# Altium PCB STM32_min.PcbDoc
Units mil, origin at the board's own origin, x right, y up, seen from the top; angles counter-clockwise.
Board outline 4531.5 x 3082.68 mil, 2 copper layers (Top Layer, Bottom Layer); 66 components, 68 nets, 278 pads, 116 vias.
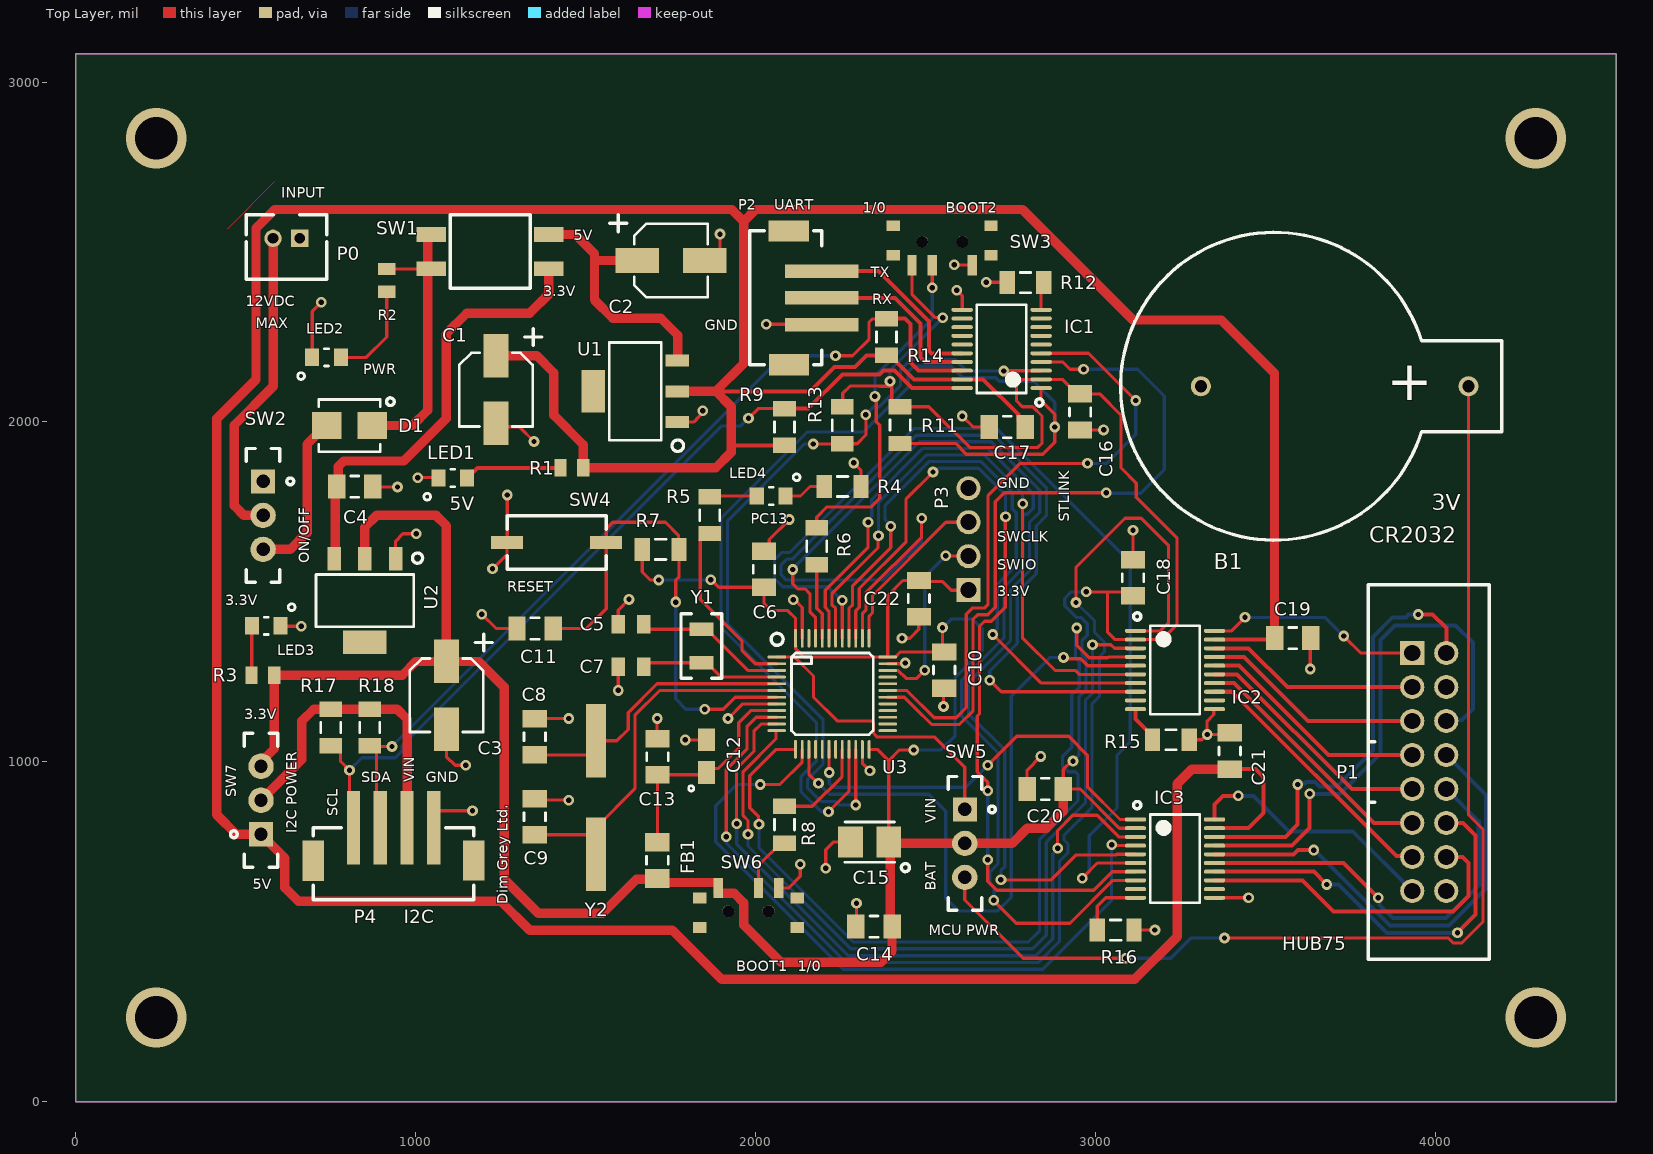
[diagram p0: Top Layer view]
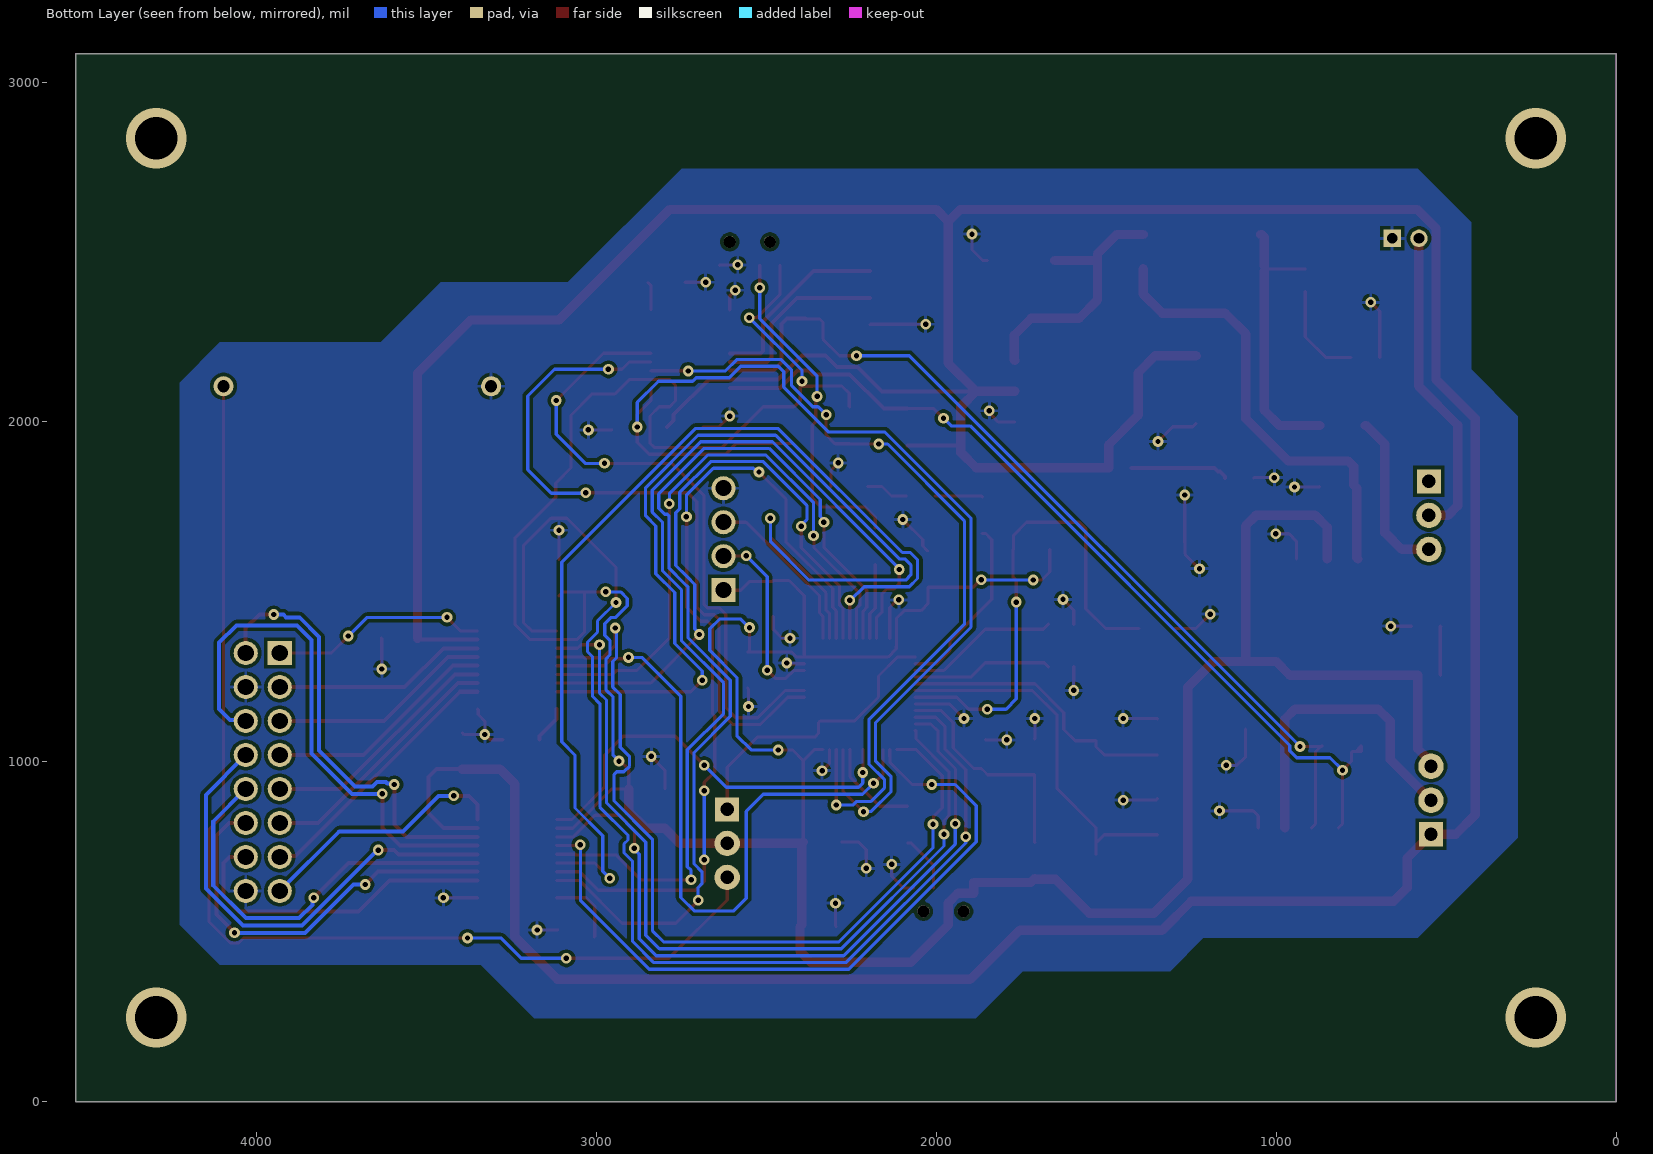
[diagram p1: Bottom Layer view, seen from below]

## Layer stack, top to bottom
Top Solder: solder mask 0.4, Solder Resist, Dk 3.5
Top Layer: signal copper 1.4
Dielectric 1: dielectric 12.6, FR-4, Dk 4.8
Bottom Layer: signal copper 1.4
Bottom Solder: solder mask 0.4, Solder Resist, Dk 3.5

## Board outline
0,0 4531.5,0 4531.5,3082.68 0,3082.68

## Design rules (kind name [scope] priority, off if disabled: settings)
Clearance [All] p1: gap=10 ignorepadtopadclearanceinfootprint=FALSE except(0: Arc-Hole Track-Hole SMDPad-Hole THPad-Hole Via-Hole Fill-Hole Poly-Hole Region-Hole Text-Hole)
PolygonConnect [All] p1: connectstyle=Relief reliefconductorwidth=10 reliefentries=4 polygonreliefangle="90 Angle" airgapwidth=10
RoutingVias [All] p1: holewidth=15.75 width=31.5 viastyle="Through Hole" minholewidth=15.75 minwidth=31.5 maxholewidth=15.75 maxwidth=31.5
SolderMaskExpansion [All] p1: expansion=4 istentingtop=FALSE
Width [All] p1: maxlimit=27.56 minlimit=9.45 preferedwidth=11.81
30 further rules are at their usual default settings.

## Classes and differential pairs
component class STM32_min: B1 C5 C6 C7 C8 C9 C10 C11 C12 C13 C14 C15 FB1 LED4 R4 R5 R6 R7 R8 SW3 SW4 SW5 SW6 U3 Y1 Y2
component class STM32_Lvl-Shft_MCU: C16 C17 IC1 R9 R11 R12 R13 R14
component class STM32_Lvl-Shft_HUB75: C18 C19 C20 C21 IC2 IC3 R15 R16
component class STM32_IO: C22 P1 P2 P3 P4 R17 R18 SW7
component class STM32_Input: C1 C2 C3 C4 D1 LED1 LED2 LED3 P0 R1 R2 R3 SW1 SW2 U1 U2

## Components (designator, comment, footprint, x,y, rotation, side; value= is the part's Value field where it differs from the comment)
B1 "3V CR1220" THT_BH-25T-GLD 4097.2,2104.84 r180 top
C1 "10uF" SMT_CAP_EL_CHANG_VT1E100MC054000CE0 1235.71,2094.88 r270 top
C2 "10uF" SMT_CAP_EL_CHANG_VT1E100MC054000CE0 1750.71,2474.88 r0 top
C3 "10uF" SMT_CAP_EL_CHANG_VT1E100MC054000CE0 1090.16,1195.81 r270 top
C4 "100nF" SMT_CAP_1206(3216)_SAMSUNG 820.16,1809.33 r180 top
C5 "10pF" SMT_CAP_CER_MODEL_0805(2012)_SAMSUNG 1633.03,1404.84 r0 top
C6 "100nF" SMT_CAP_MODEL_1206(3216)_SAMSUNG 2024.8,1566.69 r90 top
C7 "10pF" SMT_CAP_CER_MODEL_0805(2012)_SAMSUNG 1633.03,1279.84 r0 top
C8 "30pF" SMT_CAP_MODEL_1206(3216)_SAMSUNG 1350.08,1073.39 r270 top
C9 "30pF" SMT_CAP_MODEL_1206(3216)_SAMSUNG 1350.08,838.39 r270 top
C10 "100nF" SMT_CAP_MODEL_1206(3216)_SAMSUNG 2554.8,1269.84 r270 top
C11 "100nF" SMT_CAP_MODEL_1206(3216)_SAMSUNG 1350.94,1392.09 r0 top
C12 "1uF" SMT_CAP_TANT_MODEL_1206(3216)_KYOCERA 1855.43,1016.61 r90 top
C13 "100nF" SMT_CAP_MODEL_1206(3216)_SAMSUNG 1710.83,1014.84 r90 top
C14 "100nF" SMT_CAP_MODEL_1206(3216)_SAMSUNG 2348.12,514.84 r180 top
C15 "10uF" SMT_CAP_TANT_MODEL_1210(3528)_KYOCERA 2335.43,763.7 r180 top
C16 "100nF" SMT_CAP_MODEL_1206(3216)_SAMSUNG 2954.8,2029.25 r270 top
C17 "100nF" SMT_CAP_MODEL_1206(3216)_SAMSUNG 2739.8,1984.84 r180 top
C18 "100nF" SMT_CAP_MODEL_1206(3216)_SAMSUNG 3109.8,1541.69 r90 top
C19 "100nF" SMT_CAP_MODEL_1206(3216)_SAMSUNG 3579.8,1363.8 r0 top
C20 "100nF" SMT_CAP_MODEL_1206(3216)_SAMSUNG 2851.65,919.84 r180 top
C21 "100nF" SMT_CAP_MODEL_1206(3216)_SAMSUNG 3394.8,1031.69 r90 top
C22 "100nF" SMT_CAP_MODEL_1206(3216)_SAMSUNG 2480.08,1480.24 r270 top
D1 "1A" SMT_DIODE_SCHTKY_SMB_ONSEMI 805.16,1989.33 r0 top
FB1 "120Ω/3.5A" SMT_FERR_BEAD_MODEL_1206(3216)_MURATA 1710.43,709.84 r90 top
IC1 "TXS0108E" SMT_TXS0108E_IC 2723.66,2214.69 r180 top
IC2 "TXS0108E" SMT_TXS0108E_IC 3233.66,1270 r0 top
IC3 "TXS0108E" SMT_TXS0108E_IC 3233.66,715 r0 top
LED1 "RED" DIOM2012X18N 1108.58,1834.88 r180 top
LED2 "RED" DIOM2012X18N 737.48,2189.84 r180 top
LED3 "RED" DIOM2012X18N 559.8,1399.84 r0 top
LED4 "BUILT-IN PC13" DIOM2012X18N 2045.43,1781.97 r0 top
P0 "12VDC" THT_CON_WAFER_2P_STRAIGHT_A2001WV2-2P 580.16,2540.08 r0 top
P1 "HUB75" THT_CON_2316S-16G 3981.02,969.8 r0 top
P2 "UART" SMT_CON_STRAIGHT_2417SJ-03-SM2 2088.66,2364.69 r90 top
P3 "STLINK" THT_STLINK_HEADER_4P_MALE 2626.27,1654.84 r90 top
P4 "I2C" SMT_CON_STRAIGHT_2417SJ-04-SM2 934.8,699.84 r180 top
R1 "1K" SMT_RES_0805(2012) 1459.17,1864.88 r0 top
R2 "1K" SMT_RES_0805(2012) 914.8,2416.38 r90 top
R3 "500" SMT_RES_0805(2012) 550.12,1254.88 r0 top
R4 "10K" SMT_RES_MODEL_1206(3216)_ROHM 2255.67,1809.84 r0 top
R5 "0Ω" SMT_RES_MODEL_1206(3216)_ROHM 1864.8,1725.71 r90 top
R6 "10K" SMT_RES_MODEL_1206(3216)_ROHM 2179.8,1633.98 r90 top
R7 "10K" SMT_RES_MODEL_1206(3216)_ROHM 1720.43,1624.84 r180 top
R8 "10K" SMT_RES_MODEL_1206(3216)_ROHM 2084.8,814.84 r90 top
R9 "10K" SMT_RES_MODEL_1206(3216)_ROHM 2084.8,1984.84 r90 top
R11 "4.7K" SMT_RES_MODEL_1206(3216)_ROHM 2424.8,1990.71 r270 top
R12 "4.7K" SMT_RES_MODEL_1206(3216)_ROHM 2793.94,2409.84 r0 top
R13 "4.7K" SMT_RES_MODEL_1206(3216)_ROHM 2254.8,1989.84 r90 top
R14 "10K" SMT_RES_MODEL_1206(3216)_ROHM 2384.8,2249.84 r90 top
R15 "4.7K" SMT_RES_MODEL_1206(3216)_ROHM 3221.81,1065 r0 top
R16 "4.7K" SMT_RES_MODEL_1206(3216)_ROHM 3058.94,504.84 r0 top
R17 "7K" SMT_RES_MODEL_1206(3216)_ROHM 749.69,1100.87 r270 top
R18 "7K" SMT_RES_MODEL_1206(3216)_ROHM 864.69,1100.87 r270 top
SW1 "DIS02G01-R" SMT_SWITCH_DIP_DIS02G01-R 1045.16,2551.21 r270 top
SW2 "INPUT OFF/ON" THT_SSW_ESP1010 550.71,1824.88 r270 top
SW3 "BOOT2" SMT_SWW_SS-B90AP_DAWNING 2548.66,2529.69 r180 top
SW4 "TS-A07GS" SMT_TSW-A07GS 1268.74,1645.24 r0 top
SW5 "3.3V/BAT" THT_SSW_ESP1010 2615.43,859.84 r270 top
SW6 "BOOT1" SMT_SWW_SS-B90AP_DAWNING 1978.86,559.84 r0 top
SW7 "3.3V/5V" THT_SSW_ESP1010 544.69,786.73 r90 top
U1 "LM1117" SOT230P700X180-4N 1645.71,2089.88 r180 top
U2 "LD1117AS3" SMT_VR_LD1117AS3 850.16,1474.33 r270 top
U3 "STM32F103" SMT_IC_STM32F103 2225.43,1199.84 r0 top
Y1 "32.768KHz" SMT_XTAL_FC-135_EPSON 1840.43,1340.63 r90 top
Y2 "8MHz" SMT_XTAL_ATS08ASM-1E 1530.43,894.84 r90 top

## Footprints (in the part's own frame and the unit in brackets; to place one, negate y for a bottom-side part, rotate by r counter-clockwise, add the part's x,y. Pads: shape width x height; smd on the part's side, far side on the other; paste and mask are expansions set on the pad)
DIOM2012X18N [mm] "Molded Diode, 2-Leads, Body 2,00x1,25mm, IPC Medium Density"
  rect 1.05x1.3 smd: 1(-1.075,0) 2(1.075,0)
  silkscreen extent -0.15,-0.65 2.16,1.65, body extent -1.1,-0.63 1.1,0.63, height 0.8
SMT_CAP_1206(3216)_SAMSUNG [mm] "Ceramic Capacitor 1206(3216) Samsung CL31B104KBCNNNC 50VDC"
  rect 1.3x1.8 smd: 1(-1.35,0) 2(1.35,0)
  silkscreen extent -0.3,-0.8 0.3,0.8, body extent -1.6,-0.9 1.6,0.9, height 1.8
SMT_CAP_CER_MODEL_0805(2012)_SAMSUNG [mm] "SMT SAMSUNG Ceramic Capacitor MODEL *V *pF 0805(2012) CL21C100DBANNNC(etc.)"
  rect 1x1.4 smd: 1(-0.95,0) 2(0.95,0)
  body extent -1.05,-0.67 1.05,0.67, height 1.35
SMT_CAP_EL_CHANG_VT1E100MC054000CE0 [mm] "SMT Capacitor Electrolytic 35V 10uF Pitch 1.3mm VT1E100MC054000CE0"
  rect 3.25x1.85 smd: 1(-2.525,0) 2(2.525,0)
  silkscreen extent -4.57,-2.75 2.75,3.43, body extent -2.75,-2.75 2.75,2.75, height 5.7
SMT_CAP_MODEL_1206(3216)_SAMSUNG [mm] "SMT Samsung Ceramic Capacitor MODEL *V *nF 1206(3216)  CL31B104KBCNNNC(etc.)"
  rect 1.3x1.8 smd: 1(-1.35,0) 2(1.35,0)
  silkscreen extent -0.3,-0.8 0.3,0.8, body extent -1.6,-0.9 1.6,0.9, height 1.8
SMT_CAP_TANT_MODEL_1206(3216)_KYOCERA [mm] "SMT KYOCERA Tantalum Capacitor MODEL *V *uF 1206(3216) EAN_3216-18 TAJA105M016RNJ(etc.)"
  rect 1.7x1.3 smd: 1(-1.225,0) 2(1.225,0)
  silkscreen extent -2.61,0.95 -2.22,1.34, body extent -1.7,-0.9 1.7,0.9, height 1.8
SMT_CAP_TANT_MODEL_1210(3528)_KYOCERA [mm] "SMT KYOCERA Tantalum Capacitor MODEL *V *uF 1210(3528)  TAJB106K016RNJ(etc.)"
  rect 1.85x2.3 smd: 1(-1.425,0) 2(1.425,0)
  silkscreen extent -2.97,-1.5 1.85,2.21, body extent -1.85,-1.5 1.85,1.5, height 2.1
SMT_CON_STRAIGHT_2417SJ-03-SM2 [mm] "Connector 3P NELTRON 2417SJ-03-SM2-CR 100V/2A 2.0mm Pitch SMT"
  rect 1x5.5 smd: 1(-2,-2.7) 2(0,-2.7) 3(2,-2.7)
  rect 1.6x3 smd: ""(-5,-0.25) ""(5,-0.225)
  silkscreen extent -5.01,-2.7 5.01,2.7, body extent -5,-2.7 5,2.7, height 6.5
SMT_CON_STRAIGHT_2417SJ-04-SM2 [mm] "Connector 4P NELTRON 2417SJ-04-SM2-CR 100V/2A 2.0mm Pitch SMT"
  rect 1x5.5 smd: 1(-3,-2.7) 2(-1,-2.7) 3(1,-2.7) 4(3,-2.7)
  rect 1.6x3 smd: ""(-6,-0.25) ""(6,-0.225)
  silkscreen extent -6,-2.7 6,2.7, body extent -6,-2.7 6,2.7, height 6.5
SMT_DIODE_SCHTKY_SMB_ONSEMI [mm] "SMT Diode Schottky ONSEMI MODEL IF=1A VR=20V FV=0.6V MBRS120T3G"
  rect 2.2x2.05 smd: 1(-1.7,0) 2(1.7,0)
  silkscreen extent -2.3,-1.95 3.34,2.07, body extent -2.28,-1.91 2.29,1.91, height 1.8
SMT_FERR_BEAD_MODEL_1206(3216)_MURATA [mm] "SMT MURATA Ferrite Bead MODEL 1206(3216) BLM31PG121SN1L *?/*mA"
  rect 1.39x1.82 smd: 1(-1.355,0) 2(1.355,0)
  silkscreen extent -0.3,-0.81 0.3,0.81, body extent -1.7,-0.9 1.7,0.9, height 1.3
SMT_IC_STM32F103 [mm] "MCU STM32F103x8 LQFP48 pinout"
  oval 1.4x0.21 smd: 1(-4.15,2.75) 2(-4.15,2.25) 3(-4.15,1.75) 4(-4.15,1.25) 5(-4.15,0.75) 6(-4.15,0.25) 7(-4.15,-0.25) 8(-4.15,-0.75) 9(-4.15,-1.25) 10(-4.15,-1.75) 11(-4.15,-2.25) 12(-4.15,-2.75) 25(4.15,-2.75) 26(4.15,-2.25) 27(4.15,-1.75) 28(4.15,-1.25) 29(4.15,-0.75) 30(4.15,-0.25) 31(4.15,0.25) 32(4.15,0.75) 33(4.15,1.25) 34(4.15,1.75) 35(4.15,2.25) 36(4.15,2.75)
  oval 0.21x1.4 smd: 13(-2.75,-4.15) 14(-2.25,-4.15) 15(-1.75,-4.15) 16(-1.25,-4.15) 17(-0.75,-4.15) 18(-0.25,-4.15) 19(0.25,-4.15) 20(0.75,-4.15) 21(1.25,-4.15) 22(1.75,-4.15) 23(2.25,-4.15) 24(2.75,-4.15) 37(2.75,4.15) 38(2.25,4.15) 39(1.75,4.15) 40(1.25,4.15) 41(0.75,4.15) 42(0.25,4.15) 43(-0.25,4.15) 44(-0.75,4.15) 45(-1.25,4.15) 46(-1.75,4.15) 47(-2.25,4.15) 48(-2.75,4.15)
  silkscreen extent -4.57,-3.05 3.05,4.52, body extent -3.45,-3.45 3.45,3.45, height 1.6
SMT_RES_0805(2012) [mm] "0805(2012) Resistor 1/4-1/8W 150V 2A"
  rect 0.9x1.3 smd: 1(-0.85,0) 2(0.85,0)
  body extent -1.1,-0.65 1.1,0.65, height 0.55
SMT_RES_MODEL_1206(3216)_ROHM [mm] "SMT ROHM Resistor MODEL 1206(3216) 1/4W MCR18ERTJ000"
  rect 1.15x1.7 smd: 1(-1.375,0) 2(1.375,0)
  silkscreen extent -0.4,-0.75 0.4,0.75, body extent -1.6,-0.85 1.6,0.85, height 0.65
SMT_SWITCH_DIP_DIS02G01-R [mm] "DIP SMD Switch 2-Line 4-Pole 2.54Pitch Rating 25mA/24Vdc Height 0.70mm"
  rect 1.1x2.2 smd: 1(0,0) 2(2.55,0) 3(2.55,8.8) 4(0,8.8)
  silkscreen extent -1.49,1.42 4.01,7.42, body extent -1.5,1.4 4,7.4, height 4
SMT_SWW_SS-B90AP_DAWNING [mm] "Slide Switch SMD 12V 50mA 2-POS SS-B90AP-W-SP2-S085"
  rect 0.7x1.5 smd: 1(-2.25,1.75) 2(0.75,1.75) 3(2.25,1.75)
  rect 1x0.8 smd: ""(-3.65,-1.2) ""(-3.65,1) ""(3.65,-1.2) ""(3.65,1)
  round 0.9 hole 0.9: ""(-1.5,0) ""(1.5,0)
  body extent -3.3,-2.88 3.3,1.38, height 1.4
SMT_TSW-A07GS [mm] "Tactile Switch TS-A07GS 50mA 12V"
  rect 2.4x1 smd: 1(0,0) 2(7.4,0)
  silkscreen extent 0,-2 7.4,2, body extent 0.7,-1.6 6.7,1.6, height 2.5
SMT_TXS0108E_IC [mm] "TXS0108E 8-BIT Bi-Directional Level Shifter 1.2-3.6V(A) 1.65-5.5V(B)"
  oval 1.6x0.3 smd: 1(-2.95,2.925) 2(-2.95,2.275) 3(-2.95,1.625) 4(-2.95,0.975) 5(-2.95,0.325) 6(-2.95,-0.325) 7(-2.95,-0.975) 8(-2.95,-1.625) 9(-2.95,-2.275) 10(-2.95,-2.925) 11(2.95,-2.925) 12(2.95,-2.275) 13(2.95,-1.625) 14(2.95,-0.975) 15(2.95,-0.325) 16(2.95,0.325) 17(2.95,0.975) 18(2.95,1.625) 19(2.95,2.275) 20(2.95,2.925)
  silkscreen extent -3.1,-3.3 1.85,4.27, body extent -2.25,-3.3 2.25,3.3, height 1.2
SMT_VR_LD1117AS3 [mm] "Voltage Regulator ST LD1117AS33TR 1A 3.3V 10Vmax"
  rect 1.75x1 smd: 1(-3.125,2.3) 2(-3.125,0) 3(-3.125,-2.3)
  rect 1.75x3.25 smd: 4(3.125,0)
  silkscreen extent -3.56,-3.65 1.95,4.32, body extent -1.85,-3.65 1.85,3.65, height 1.8
SMT_XTAL_ATS08ASM-1E [mm] "SMD Quartz Crystal ATS08ASM-1E 20pF 8MHz"
  rect 5.5x1.5 smd: 1(-4.24,0) 2(4.24,0)
  body extent -5.5,-2.4 5.55,2.4, height 3.6
SMT_XTAL_FC-135_EPSON [mm] "SMD Quartz Crystal EPSON FC-135 12.5pF 32.768KHz ±20.0ppm"
  rect 1x1.8 smd: 1(-1.25,0) 2(1.25,0)
  silkscreen extent -2.41,-1.52 2.41,1.52, body extent -1.6,-0.76 1.6,0.76, height 1
SOT230P700X180-4N [mm] "SOT223, 4-Leads, Body 7,00x7,00mm (avg), Pitch 2,30mm, IPC Medium Density"
  rect 1.75x0.9 smd: 1(-3.125,2.3) 2(-3.125,0) 3(-3.125,-2.3)
  rect 1.75x3.2 smd: 4(3.125,0)
  silkscreen extent -3.61,-3.65 1.95,4.49, body extent -1.85,-3.65 1.85,3.65, height 1.8
THT_BH-25T-GLD [mm] "Battery Holder for CR-2032 Type Battery BH-25T-GLD"
  round 1.5 hole 0.9: 1(0,0) 2(20,0)
  silkscreen extent -2.5,-11.5 26,11.5, body extent -2.5,-11.5 26,11.5, height 7.7
THT_CON_2316S-16G [mm] "Connector 2316S-16G 16 Pin 2.54 Pitch"
  rect 1.8x1.8 hole 1.2: 1(-1.25,8.895)
  round 1.8 hole 1.2: 2(1.29,8.895) 3(-1.25,6.355) 4(1.29,6.355) 5(-1.25,3.815) 6(1.29,3.815) 7(-1.25,1.275) 8(1.29,1.275) 9(-1.25,-1.265) 10(1.29,-1.265) 11(-1.25,-3.805) 12(1.29,-3.805) 13(-1.25,-6.345) 14(1.29,-6.345) 15(-1.25,-8.885) 16(1.29,-8.885)
  silkscreen extent -4.55,-13.99 4.5,13.99, body extent -4.59,-14.03 4.55,14, height 8.85
THT_CON_WAFER_2P_STRAIGHT_A2001WV2-2P [mm] "Connector Wafer 2-Pins Pitch-2.0mm Straight Pins A2001WV2-2P"
  rect 1.3x1.3 hole 0.8: 1(2,0)
  round 1.3 hole 0.8: 2(0,0)
  silkscreen extent -2,-3.05 4,1.75, body extent -2.1,-3.2 4.1,1.9, height 6
THT_SSW_ESP1010 [mm] "Slide Switch ESP1010 12V 0.5A"
  rect 1.8x1.8 hole 1: 1(0,0)
  round 1.9 hole 1: 2(5.08,0) 3(2.54,0)
  silkscreen extent -2.46,-1.25 7.54,2.29, body extent -2.44,-1.25 7.56,1.25, height 9.5
THT_STLINK_HEADER_4P_MALE [mm] "Dupont Header Male STLINK 4P 2.54 Pitch"
  rect 1.8x1.8 hole 1.2: 1(-3.81,0)
  round 1.8 hole 1.2: 2(-1.27,0) 3(1.27,0) 4(3.81,0)
  body extent -5.08,-1.27 5.08,1.27, height 8.54

## Part data
B1: library part THT_BH-25T-GLD, "Battery Holder for CR-2032 Type Battery BH-25T-GLD"
C1 C2 C3: library part SMT_CAP_EL_CHANG_VT1E100MC054000CE0, "SMT Capacitor Electrolytic 35V 10uF Pitch 1.3mm VT1E100MC054000CE0"
C4: library part SMT_CAP_1206(3216)_SAMSUNG, "Ceramic Capacitor 1206(3216) Samsung CL31B104KBCNNNC 50VDC"
C5 C7: library part SMT_CAP_CER_MODEL_0805(2012)_SAMSUNG, "SMT SAMSUNG Ceramic Capacitor MODEL *V *pF 0805(2012) CL21C100DBANNNC(etc.)"
C6 C8 C9 C10 C11 C13 C14 C16 C17 C18 C19 C20 C21 C22: library part SMT_CAP_MODEL_1206(3216)_SAMSUNG, "SMT Samsung Ceramic Capacitor MODEL *V *nF 1206(3216)  CL31B104KBCNNNC(etc.)"
C12: library part SMT_CAP_TANT_MODEL_1206(3216)_KYOCERA, "SMT KYOCERA Tantalum Capacitor MODEL *V *uF 1206(3216) EAN_3216-18 TAJA105M016RNJ(etc.)"
C15: library part SMT_CAP_TANT_MODEL_1210(3528)_KYOCERA, "SMT KYOCERA Tantalum Capacitor MODEL *V *uF 1210(3528)  TAJB106K016RNJ(etc.)"
D1: library part SMT_DIODE_SCHTKY_SMB_ONSEMI, "SMT Diode Schottky ONSEMI MODEL IF=1A VR=20V FV=0.6V MBRS120T3G"
FB1: library part SMT_FERR_BEAD_MODEL_1206(3216)_MURATA, "SMT MURATA Ferrite Bead MODEL 1206(3216) BLM31PG121SN1L *Ω/*mA"
IC1 IC2 IC3: library part SMT_TXS0108E_IC, "TXS0108E 8-BIT Bi-Directional Level Shifter 1.2-3.6V(A) 1.65-5.5V(B)"
LED1 LED2 LED3 LED4: library part SMT_LED_0805(2012), "Led Diode 0805(2012) Cathode Mark, 20mA"
P0: library part THT_CON_WAFER_2P_STRAIGHT_A2001WV2-2P, "Connector Wafer 2-Pins Pitch-2.0mm Straight Pins A2001WV2-2P"
P1: library part THT_CON_2316S-16G, "Connector 2316S-16G 16 Pin 2.54 Pitch"
P2: library part SMT_CON_STRAIGHT_2417SJ-03-SM2, "Connector 3P NELTRON 2417SJ-03-SM2-CR 100V/2A 2.0mm Pitch SMT"
P3: library part THT_STLINK_HEADER_4P_MALE, "Dupont Header Male STLINK 4P 2.54 Pitch"
P4: library part SMT_CON_STRAIGHT_2417SJ-04-SM2, "Connector 4P NELTRON 2417SJ-04-SM2-CR 100V/2A 2.0mm Pitch SMT"
R1 R2 R3: library part SMT_RES_0805(2012), "0805(2012) Resistor 1/4-1/8W 150V 2A"
R4 R5 R6 R7 R8 R9 R11 R12 R13 R14 R15 R16 R17 R18: library part SMT_RES_MODEL_1206(3216)_ROHM, "SMT ROHM Resistor MODEL 1206(3216) 1/4W MCR18ERTJ000"
SW1: library part SMT_SWITCH_DIP_DIS02G01-R, "DIP SMD Switch 2-Line 4-Pole 2.54Pitch Rating 25mA/24Vdc Height 0.70mm"
SW2 SW5 SW7: library part THT_SSW_ESP1010, "Slide Switch ESP1010 12V 0.5A"
SW3 SW6: library part SMT_SWW_SS-B90AP_DAWNING, "Slide Switch SMD 12V 50mA 2-POS SS-B90AP-W-SP2-S085"
SW4: library part SMT_TSW-A07GS, "Tactile Switch TS-A07GS 50mA 12V"
U1: library part LM1117_SOT-223, "LM1117 SOT-223 5V HTC Voltage Regulator"
U2: library part SMT_VR_LD1117AS3, "Voltage Regulator ST LD1117AS33TR 1A 3.3V 10Vmax"
U3: library part SMT_IC_STM32F103, "MCU STM32F103x8 LQFP48 pinout"
Y1: library part SMT_XTAL_FC-135_EPSON, "SMD Quartz Crystal EPSON FC-135 12.5pF 32.768KHz ±20.0ppm"
Y2: library part SMT_XTAL_ATS08ASM-1E, "SMD Quartz Crystal ATS08ASM-1E 20pF 8MHz"

## Via types
v1: diameter 31.5, hole 15.75, Top Layer to Bottom Layer, 112 vias
v2: diameter 177.17, hole 125.98, Top Layer to Bottom Layer, 4 vias

## Nets (pads, with @x,y where several pads share a name; then routed paths per layer and width w, separated by ;. In a path a pad name is that pad's centre, name@x,y a point inside that pad or via, vN(x,y) a via of type N, cw(c..) or ccw(c..) an arc to the next point about the centre after c; other vN are vias at no path point)
+3.3V: C3.1 C6.1 C10.1 C14.1 C15.1 C16.1 C18.1 C20.1 C22.1 FB1.1 IC1.2 IC2.2 IC3.2 P3.1 R3.2 R7.2 R11.1 R13.2 SW3.3 SW5.3 SW6.1 SW7.2 U2.2 U3.24 U3.36 U3.48 | length 11294.5
  Top Layer w9.45: R7.2 1666.3,1558.35 1689.8,1534.84 v1(1714.8,1534.84) ; v1(1867.4,1535.14) 1870.37,1535.14 1891.97,1513.54 C6.1 2024.8,1464.84 2044.8,1444.84 2094.8,1444.84 2117.17,1422.48 2117.17,1340.98 2117.76,1340.39 2117.76,1332.23 2142.05,1307.93 U3.36@2366.57,1307.93 ; R13.2 2256.43,2045.61 2256.43,2084.43 2277.45,2105.44 2363.45,2105.44 2364.05,2104.84 v1@2400.64,2104.84 ; U3.24 2358.19,1036.46 2391.54,1003.11 ; U3.36@2366.57,1308.11 U3.36 ; C15.1 2391.54,1003.11 ; v1(2395.25,2119.39) 2399.47,2115.18 2399.47,2106.02 v1@2400.64,2104.84 ; SW3.3 2460.08,2374.6 2507.19,2327.49 2527.38,2307.3 2549.75,2307.3 v1(2550.28,2306.78) ; v1(2464.8,1034.84) 2423.27,1034.84 2391.54,1003.11 ; v1(2549.8,1394.84) 2549.8,1327.99 C10.1 2475.17,1322.99 2475.01,1323.15 2426.09,1323.15 2411.05,1308.11 U3.36 ; P3.1 2575.47,1504.84 2550.08,1530.24 2483.23,1530.24 C22.1 2433.23,1533.39 2388.82,1488.98 U3.36 ; v1(2933.56,1002.05) 2929.24,1002.05 2904.8,977.62 C20.1 2954.8,919.84 3070.08,804.57 IC3.2 ; v1(2973.03,1499.84) 3034.8,1499.84 ; C18.1 3098.5,1499.84 3034.8,1499.84 ; v1@2400.64,2104.84 2400.64,2062.76 2418.56,2044.84 2509.8,2044.84 2629.8,1924.84 2829.8,1924.84 2842.41,1937.45 2842.41,2017.23 2814.8,2044.84 2784.62,2044.84 2767.3,2062.16 2767.3,2107.34 2785.08,2125.12 IC1.2 2902.24,2125.12 2944.96,2082.4 C16.1 3012.24,2082.4 3074.8,2019.84 3074.8,1864.84 3119.8,1819.84 3119.8,1777.83 3239.8,1657.83 3239.8,1404.84 3194.53,1359.57 IC2.2 3057.58,1359.57 3034.8,1382.35 3034.8,1499.84
  Top Layer w27.56: SW7.2 544.69,999.52 583.58,1038.41 R3.2 959.84,1254.88 1000.18,1295.22 C3.1 ; U2.2 850.16,1690.2 884.8,1724.84 1059.8,1724.84 1090.16,1694.49 C3.1 ; C15.1 2395.39,759.84 SW5.3 2754.8,759.84 2799.8,804.84 2855.08,804.84 2904.8,854.56 C20.1 ; C15.1@2396.4,758.83 2396.4,519.71 C14.1 2401.27,442.45 2368.66,409.84 2074.8,409.84 1964.8,519.84 1964.8,584.84 1936.65,612.99 1890.28,612.99 SW6.1 1890.28,644.49 1889.92,644.84 1722.09,644.84 FB1.1 1708.39,654.45 1649.41,654.45 1549.8,554.84 1359.8,554.84 1259.8,654.84 1259.8,1219.84 1184.42,1295.22 C3.1
  Bottom Layer w9.45: v1(1714.8,1534.84) 1714.95,1534.99 1867.25,1534.99 v1(1867.4,1535.14) ; v1(2395.25,2119.39) 2395.25,2151.75 v1(2550.28,2306.78) ; v1(2464.8,1034.84) 2544.8,1034.84 2586.61,1076.65 2586.61,1247.95 2666.77,1328.11 2666.77,1391.1 2638.03,1419.84 2574.8,1419.84 v1(2549.8,1394.84) ; v1(2933.56,1002.05) 2950.9,1019.39 2950.9,1190.47 2971.46,1211.02 2971.46,1303.15 2960.43,1314.17 2960.43,1356.98 2975.35,1371.9 2975.35,1406.32 2956.81,1424.86 2943.14,1424.86 2909.43,1458.58 2909.43,1480.29 2928.98,1499.84 v1(2973.03,1499.84)
+5V: C1.1 C17.1 C19.1 C21.1 IC1.19 IC2.19 IC3.19 R1.2 R9.1 R14.1 SW7.1 U1.2 | length 13125.1
  Top Layer w11.81: 1882.64,2089.88 2159.84,2089.88 2231.61,2161.65 2291.61,2161.65 2325.67,2195.71 R14.1 2395.63,2195.71 2466.22,2125.12 IC1.19 2669.53,2125.12 2773.27,2021.38 2773.27,2004.53 C17.1 ; 1927.64,1929.84 1928.5,1930.71 R9.1 ; IC3.19 3449.53,804.57 3494.8,849.84 3494.8,954.84 3471.1,978.54 C21.1 ; IC2.19 3522.43,1359.57 C19.1
  Top Layer w27.56: C1.1 1356.3,2194.29 1405.71,2144.88 1405.71,2019.88 1492.64,1932.95 R1.2 1882.64,1864.88 1927.64,1909.88 1927.64,1929.84 1927.64,2044.88 1882.64,2089.88 ; U1.2 1882.64,2089.88 ; C21.1 3283.5,978.54 3239.8,934.84 3239.8,484.84 3114.8,359.84 1899.8,359.84 1754.8,504.84 1334.8,504.84 1249.8,589.84 654.8,589.84 614.8,629.84 614.8,716.61 SW7.1 471.69,786.73 414.8,843.62 414.8,849.84 414.8,2009.84 529.8,2124.84 529.8,2569.84 584.8,2624.84 1929.8,2624.84 1964.8,2589.84 ; C19.1 3526.65,2142.99 3369.8,2299.84 3109.8,2299.84 2784.8,2624.84 1999.8,2624.84 1964.8,2589.84 ; 1882.64,2089.88 1964.8,2172.05 1964.8,2589.84
GND: B1.2 C1.2 C2.2 C3.2 C4.1 C5.1 C6.2 C7.1 C8.1 C9.1 C10.2 C11.1 C12.2 C13.2 C14.2 C15.2 C16.2 C17.2 C18.2 C19.2 C20.2 C21.2 C22.2 IC1.11 IC2.11 IC3.11 LED1.2 LED2.2 LED3.2 P0.1 P1.4 P1.16 P2.1 P3.4 P4.1 R4.2 R12.1 R15.2 R16.2 SW3.1 SW4.1 SW6.3 U1.1 U2.1 U3.8 U3.23 U3.35 U3.47 | length 4216.7
  Top Layer w9.45: LED3.2 602.99,1398.98 v1(662.83,1398.98) ; LED2.2 695.16,2325 v1(721.89,2351.73) ; C4.1 874.21,1808.43 v1(946.3,1808.43) ; U2.1 940.71,1649.29 962.05,1670.63 v1(1001.42,1670.63) ; v1(1005.35,1835.98) 1065.16,1835.98 LED1.2 ; P4.1 1052.91,840.71 1067.87,855.67 v1(1166.77,855.67) ; C3.2 1090.16,1014.96 1115.59,989.53 v1(1147.09,989.53) ; v1(1194.33,1434.41) 1236.65,1392.09 C11.1 ; v1(1225.83,1568.27) 1268.74,1611.18 SW4.1 1269.13,1645.63 v1(1269.13,1784.8) ; C1.2 1245.59,1985.59 1304.57,1985.59 v1(1347.87,1942.28) ; C9.1 1354.45,887.17 v1(1450.24,887.17) ; C8.1 1350.87,1127.32 v1(1450.24,1127.32) ; C7.1 1595.91,1279.57 v1(1595.91,1210) ; C5.1 1595.63,1445.95 v1(1627.4,1477.72) ; v1(1710.08,1127.32) 1710.08,1068.74 C13.2 ; U1.1 1817.41,1999.33 1826.36,2008.28 1826.36,2009.29 1843.94,2026.87 v1(1843.94,2032.83) ; v1(1792.76,1064.33) 1854.92,1064.33 C12.2 ; C2.2 1863.43,2474.88 1895.12,2506.57 v1(1895.12,2552.52) ; v1(1918.74,1127.32) 1961.73,1170.32 U3.8 ; C6.2 2039.9,1634.94 2039.9,1654.07 v1(2098.43,1712.6) ; v1(2031.5,2287.4) 2193.5,2287.4 P2.1 ; SW6.3 2097.32,628.74 2131.34,662.76 v1(2131.34,698.19) ; v1(2110.24,1476.38) 2114.47,1476.38 2136.85,1454 U3.47 ; v1(2206.14,686.38) 2206.14,741.5 2228.35,763.7 C15.2 ; v1(2288.82,1879.29) 2309.8,1858.31 R4.2 ; C14.2 2296.69,516.56 v1(2296.69,584.02) ; U3.23 2314.02,995.83 v1(2336.06,973.78) ; U3.35 2389.06,1288.66 2438.11,1288.66 v1(2440.21,1290.77) ; v1(2430.55,1363.54) 2454.09,1363.54 2480.08,1389.53 C22.2 ; v1(2552.6,1162.76) 2552.6,1214.49 C10.2 ; v1(2584.09,2461.97) 2636.06,2461.97 SW3.1 ; v1(2591.97,2387.17) 2591.97,2386.16 2607.52,2370.61 IC1.11 ; v1(2607.72,2017.09) 2639.96,1984.84 C17.2 ; v1(2678.58,2410.79) 2738.86,2410.79 R12.1 ; C20.2 2798.5,975.67 v1(2838.58,1015.75) ; C16.2 2955.08,1976.38 v1(3023.62,1976.38) ; C18.2 3110.24,1595.28 v1(3110.24,1681.1) ; R16.2 3113.5,505.28 v1(3174.65,505.28) ; R15.2 3312.47,1065 3327.55,1080.08 v1(3328.19,1080.08) ; IC3.11 IC3.11 v1(3450.24,599.76) v1(3450.24,599.76) ; IC2.11 3348.97,1154.84 3347.87,1153.75 3347.87,1139.13 3328.19,1119.45 v1(3328.19,1080.08) ; C21.2 3390.04,1080.08 v1(3328.19,1080.08) ; v1(3631.34,1272.99) 3631.34,1362.18 C19.2
NetB1_1: B1.1 SW5.2 | length 3312.3
  Top Layer w9.45: SW5.2 2615.43,593.23 2786.95,421.71 v1(3088.5,421.71) ; v1(3379.37,481.65) 4036.97,481.65 4051.76,466.87 4077.66,466.87 4139.99,529.2 4139.99,800.96 4097.2,843.74 B1.1
  Bottom Layer w9.45: v1(3088.5,421.71) 3221,421.71 3280.94,481.65 v1(3379.37,481.65)
NetC2_1: C2.1 SW1.4 U1.3 | length 782.3
  Top Layer w27.56: SW1.4 1469.38,2551.21 1525.71,2494.88 1525.71,2474.88 ; C2.1 1525.71,2474.88 ; U1.3 1770.71,2182.4 1770.71,2254.88 1720.71,2304.88 1579.76,2304.88 1525.71,2358.94 1525.71,2474.88
NetC4_2: C4.2 SW1.3 U2.3 | length 1327.1
  Top Layer w27.56: U2.3 763.31,1601.06 763.31,1805.63 772.01,1814.33 772.01,1868.7 788.15,1884.84 964.8,1884.84 1089.8,2009.84 1089.8,2259.84 1149.8,2319.84 1334.8,2319.84 1391.61,2376.65 SW1.3
NetC5_2: C5.2 U3.3 Y1.2 | length 448
  Top Layer w9.45: C5.2 1685.39,1389.84 Y1.2 1856.18,1389.84 1977.28,1268.74 U3.3
NetC7_2: C7.2 U3.4 Y1.1 | length 414
  Top Layer w9.45: C7.2 1682.01,1291.42 Y1.1 1856.18,1291.42 1898.54,1249.06 U3.4
NetC8_2: C8.2 U3.5 Y2.2 | length 837.5
  Top Layer w9.45: C8.2 1505.63,1020.24 1530.43,1045.04 Y2.2 1591.73,1061.77 1624.8,1094.84 1624.8,1144.59 1709.59,1229.37 U3.5
NetC9_2: C9.2 U3.6 Y2.1 | length 1094.4
  Top Layer w9.45: C9.2 1505.63,785.24 Y2.1@1530.43,760.43 ; Y2.1 Y2.1@1530.43,760.43 ; U3.6 1717.6,1209.69 1644.8,1136.89 1644.8,921.02 1530.43,806.65 Y2.1@1530.43,760.43
NetC11_2: C11.2 R7.1 SW4.2 U3.7 | length 1462.7
  Top Layer w9.45: C11.2 1502.05,1392.09 1560.08,1450.12 SW4.2 1560.08,1685.12 1579.8,1704.84 1734.8,1704.84 1772.7,1666.95 1772.7,1626.71 R7.1 1774.57,1544.61 1764.8,1534.84 v1(1764.8,1469.84) ; v1(1849.8,1154.84) 1904.8,1154.84 1939.96,1190 U3.7
  Bottom Layer w9.45: v1(1764.8,1469.84) 1764.8,1184.84 1794.8,1154.84 v1(1849.8,1154.84)
NetC12_1: C12.1 C13.1 FB1.2 U3.9 | length 671.8
  Top Layer w9.45: FB1.2 1710.83,763.58 C13.1 1848.74,961.69 C12.1 1867.26,980.21 1889.66,980.21 1950.08,1040.63 1950.08,1115.12 1985.59,1150.63 U3.9
NetD1_1: D1.1 SW2.2 | length 490.7
  Top Layer w27.56: SW2.2 630.71,1624.88 680.16,1674.33 680.16,1934.21 735.28,1989.33 D1.1
NetD1_2: D1.2 R2.2 SW1.1 SW1.2 | length 815.1
  Top Layer w9.45: R2.2 1025.96,2449.84 SW1.2@1034.8,2458.69 ; 1034.13,2233.82 1035.16,2234.84 ; 1034.13,2293.82 1035.16,2294.84
  Top Layer w27.56: D1.2 990.16,1989.33 1035.16,2034.33 1035.16,2234.84 1035.16,2294.84 SW1.2@1035.16,2442.94 ; SW1.2@1034.8,2458.69 1034.8,2543.33 1042.68,2551.21 SW1.1
NetIC1_1: IC1.1 R11.2 U3.21 | length 3222.8
  Top Layer w9.45: v1(2214.21,853.04) 2274.65,913.48 U3.21 ; R11.2 2588.07,1936.58 2619.8,1904.84 2844.8,1904.84 2879.8,1939.84 v1(2879.8,1984.84) 2879.8,2022.05 2839.8,2062.05 IC1.1
  Bottom Layer w9.45: v1(2214.21,853.04) 2213.31,853.94 2191.68,853.94 2133.16,912.46 2133.16,955.84 2178.58,1001.26 2178.58,1115.57 1897.87,1396.28 1897.87,1716.77 2150.95,1969.84 2316.3,1969.84 2448.82,2102.36 2448.82,2148.09 2464.49,2163.76 2575.42,2163.76 2609.25,2129.92 2706.63,2129.92 2717.18,2119.37 2817.64,2119.37 2820.41,2116.6 2879.8,2057.2 v1(2879.8,1984.84)
NetIC1_3: IC1.3 R13.1 U3.22 | length 2442.5
  Top Layer w9.45: v1(2169.8,1934.84) 2253.94,1934.84 R13.1 2298.33,1935.71 2324.67,1962.05 2324.67,2019.97 v1(2324,2020.64) ; v1(2294.3,872.63) U3.22@2294.31,1036.44 ; v1(2729.8,2149.84) 2730.24,2150.28 2839.37,2150.28 IC1.3
  Bottom Layer w9.45: v1(2169.8,1934.84) 2143.45,1934.84 1917.32,1708.72 1917.32,1404.33 2198.27,1123.39 2198.27,993.44 2152.84,948.02 2152.84,922.65 2191.98,883.52 2234.71,883.52 2245.6,872.63 v1(2294.3,872.63) ; v1(2324,2020.64) 2347.86,2044.5 2363.45,2044.5 2425.72,2106.77 2425.72,2152.5 2456.43,2183.2 2587.45,2183.2 2620.81,2149.84 v1(2729.8,2149.84)
NetIC1_4: IC1.4 U3.30 | length 2118.3
  Top Layer w9.45: U3.30 2437.15,1190 2469.8,1157.35 2517.31,1109.84 2599.8,1109.84 2639.06,1149.09 2639.06,1418.58 2653.31,1432.83 2682.8,1432.83 2704.8,1454.84 2704.8,1764.84 2731.3,1791.34 v1(3031.5,1791.34) ; IC1.4 2903.35,2176.3 2924.8,2154.84 v1(2964.8,2154.84)
  Bottom Layer w9.45: v1(2964.8,2154.84) 3123.5,2154.84 3202.2,2076.14 3202.2,1859.61 3132.44,1789.84 3032.99,1789.84 v1(3031.5,1791.34)
NetIC1_5: IC1.5 U3.31 | length 1892
  Top Layer w9.45: U3.31 2444.97,1209.69 2524.81,1129.84 2589.8,1129.84 2619.61,1159.65 2619.61,1434.57 2637.32,1452.28 2672.76,1452.28 2683.77,1463.3 2683.77,1783.81 2777.91,1877.95 v1(2976.38,1877.95) ; IC1.5 2979.21,2201.89 v1(3118.11,2062.99)
  Bottom Layer w9.45: v1(2976.38,1877.95) 3032.91,1877.95 3118.11,1963.15 v1(3118.11,2062.99)
NetIC1_10: IC1.10 R12.2 | length 83.4
  Top Layer w9.45: IC1.10 2839.8,2401.57 R12.2
NetIC1_16: IC1.16 P2.3 | length 563.1
  Top Layer w11.81: P2.3 2361.46,2443.43 2509.8,2295.08 2509.8,2208.81 2516.72,2201.89 IC1.16
NetIC1_17: IC1.17 P2.2 | length 548.8
  Top Layer w11.81: P2.2 2409.35,2364.69 2484.8,2289.23 2484.8,2189.84 2498.35,2176.3 IC1.17
NetIC1_18: IC1.18 P4.3 R14.2 R18.2 | length 2673.9
  Top Layer w9.45: R18.2 866.57,1044.84 R18.2@868.78,1044.84 ; P4.3 884.8,816.77 884.8,1028.82 R18.2@868.78,1044.84 ; v1(929.8,1044.84) R18.2@868.78,1044.84 ; v1(2234.8,2194.84) 2284.8,2194.84 2333.71,2243.75 2333.71,2293.8 2342.7,2302.79 2383.62,2302.79 R14.2
  Top Layer w11.81: R14.2 2438.65,2303.98 2454.8,2287.82 2454.8,2174.84 2478.94,2150.71 IC1.18
  Bottom Layer w9.45: v1(929.8,1044.84) 2079.8,2194.84 v1(2234.8,2194.84)
NetIC1_20: IC1.20 P4.4 R9.2 R17.2 | length 2627
  Top Layer w9.45: R17.2@777.28,1029.96 R17.2@766.46,1029.96 ; R17.2@778.43,1028.82 778.43,1001.22 v1(804.8,974.84) 804.8,818.03 P4.4 ; v1(1978.85,2010.8) 2007.03,2038.98 R9.2 ; R17.2@766.46,1029.96 749.69,1029.96 R17.2 R17.2@766.46,1029.96
  Top Layer w11.81: R9.2 2153.94,2038.98 2254.8,2139.84 2364.27,2139.84 2375.47,2151.05 2408.36,2151.05 2459.88,2099.53 IC1.20
  Bottom Layer w9.45: v1(804.8,974.84) 841.77,1011.81 939.87,1011.81 960.28,1032.22 960.28,1047.81 1900.65,1988.19 1956.24,1988.19 v1(1978.85,2010.8)
NetIC2_1: IC2.1 U3.10 | length 3517.5
  Top Layer w9.45: v1(1913.63,779.68) 1913.63,976.63 1974.8,1037.8 1974.8,1104.84 2001.11,1131.15 2061.84,1131.15 U3.10 ; v1(2942.56,1468.54) 2942.56,1572.48 3086.61,1716.54 3133.86,1716.54 3214.8,1635.59 3214.8,1409.84 3190.12,1385.16 IC2.1
  Bottom Layer w9.45: v1(1913.63,779.68) 1913.63,760.91 2264.7,409.84 2832.31,409.84 2893.7,471.24 2893.7,706.64 2918.8,731.74 2918.8,758.37 2907.26,769.91 2907.26,784.06 2989.84,866.65 2989.84,1170.94 3011.59,1192.69 3011.59,1309.36 3026.27,1324.05 3026.27,1352.09 2996.79,1381.57 2996.79,1414.31 v1(2942.56,1468.54)
NetIC2_3: IC2.3 U3.12 | length 2447.4
  Top Layer w9.45: v1(1977.33,786.58) 1977.33,827.32 1963.12,841.53 1963.12,970.99 2059.8,1067.68 U3.12@2059.8,1090.98 ; U3.12@2060.39,1091.58 U3.12 ; v1(2990.91,1344.36) 3045.28,1344.36 3055.67,1333.98 IC2.3
  Bottom Layer w9.45: v1(1977.33,786.58) 1977.33,752.23 2279.68,449.88 2814.84,449.88 2854.8,489.84 2854.8,763.76 2970.39,879.35 2970.39,1181.69 2990.91,1202.21 v1(2990.91,1344.36)
NetIC2_4: IC2.4 U3.13 | length 2578.9
  Top Layer w9.45: v1(2009.8,816.18) 2008.47,817.51 2008.47,838.27 1982.57,864.18 1982.57,958.95 2060.08,1036.46 U3.13 ; v1(2944.88,1393.7) 2944.88,1342.52 2981.33,1306.07 3035.35,1306.07 3037.67,1308.39 IC2.4
  Bottom Layer w9.45: v1(2009.8,816.18) 2009.8,747.26 2287.22,469.84 2801.76,469.84 2835.35,503.43 2835.35,771.82 2948.14,884.6 2948.14,962.85 2940.27,970.71 2919.05,970.71 2902.48,987.28 2902.48,1014.66 2930.2,1042.38 2930.2,1197.91 2952.01,1219.73 2952.01,1295.09 2940.98,1306.12 2940.98,1389.8 v1(2944.88,1393.7)
NetIC2_5: IC2.5 U3.15 | length 2016.1
  Top Layer w9.45: U3.15 2156.54,963.58 2183.33,936.79 v1(2184.71,936.79) ; v1(2905.51,1307.09) 2909.35,1303.25 2956.59,1303.25 2977.05,1282.8 IC2.5
  Bottom Layer w9.45: v1(2184.71,936.79) 2217.31,904.18 2508.9,904.18 2559.06,854.03 2559.06,598.43 2596.18,561.3 2712.51,561.3 2751.97,600.75 2751.97,1192.91 2866.14,1307.09 v1(2905.51,1307.09)
NetIC2_6: IC2.6 U3.42 | length 1792.3
  Top Layer w9.45: U3.42 2235.28,1451.28 2224.33,1462.22 2224.33,1494.37 2360.28,1630.32 2360.28,1663.94 v1(2361.18,1664.84) ; v1(2786.09,1759.37) 2784.72,1758.01 2784.72,1364.88 2880.68,1268.92 2939.74,1268.92 2951.46,1257.2 IC2.6
  Bottom Layer w9.45: v1(2361.18,1664.84) 2361.18,1762.48 2501.3,1902.6 2672.06,1902.6 2784.72,1789.93 2784.72,1760.73 v1(2786.09,1759.37)
NetIC2_7: IC2.7 U3.40 | length 1844.8
  Top Layer w9.45: U3.40 2274.65,1451.59 2285.28,1462.22 2285.28,1517.81 2397.64,1630.17 v1(2397.64,1692.91) ; v1(2697.66,1374.47) 2840.52,1231.61 IC2.7
  Bottom Layer w9.45: v1(2397.64,1692.91) 2397.64,1695.59 2380.63,1712.6 2380.63,1754.42 2509.36,1883.15 2664,1883.15 2754.72,1792.43 2754.72,1744.49 2766.83,1732.38 2766.83,1577.56 2734.69,1545.42 2710.91,1521.63 2710.91,1391.03 2697.66,1377.79 v1(2697.66,1374.47)
NetIC2_8: IC2.8 U3.38 | length 3070.8
  Top Layer w9.45: U3.38 2314.02,1435.95 2324.17,1446.11 2324.17,1496.84 2488.19,1660.85 v1(2488.19,1716.54) ; v1(2688.98,1240.16) 2723.11,1206.02 IC2.8
  Bottom Layer w9.45: v1(2488.19,1716.54) 2488.19,1648.23 2374.57,1534.61 2090.04,1534.61 2074.8,1549.84 2074.8,1579.33 2091.68,1596.21 2108.1,1596.21 2472.83,1960.95 2701.21,1960.95 2855.46,1806.69 2855.46,1724.06 2825.18,1693.79 2825.18,1553.4 2769.8,1498.02 2769.8,1347.94 2688.98,1267.11 v1(2688.98,1240.16)
NetIC2_10: IC2.10 R15.1 | length 110.6
  Top Layer w11.81: IC2.10 3117.52,1125.98 3167.68,1075.83 R15.1
NetIC2_13: IC2.13 P1.13 | length 783.3
  Top Layer w11.81: IC2.13 3401.73,1206.02 3885.58,722.18 3929.63,722.18 P1.13
NetIC2_14: IC2.14 P1.11 | length 752.5
  Top Layer w11.81: IC2.14 3406.99,1231.61 3818.6,820 P1.11
NetIC2_15: IC2.15 P1.9 | length 721.7
  Top Layer w11.81: IC2.15 3416.6,1257.2 3753.8,920 P1.9
NetIC2_16: IC2.16 P1.7 | length 690.9
  Top Layer w11.81: IC2.16 3421.85,1282.8 3684.65,1020 P1.7
NetIC2_17: IC2.17 P1.5 | length 660
  Top Layer w11.81: IC2.17 3436.26,1308.39 3624.65,1120 P1.5
NetIC2_18: IC2.18 P1.3 | length 629.2
  Top Layer w11.81: IC2.18 3450.67,1333.98 3564.65,1220 P1.3
NetIC2_20: IC2.20 P1.1 | length 641.9
  Top Layer w9.45: IC2.20 3400.12,1385.16 v1(3439.8,1424.84) ; v1(3729.8,1369.84) 3779.65,1320 P1.1
  Bottom Layer w9.45: v1(3439.8,1424.84) 3674.8,1424.84 v1(3729.8,1369.84)
NetIC3_1: IC3.1 U3.18 | length 1224.2
  Top Layer w9.45: U3.18 2215.94,1036.11 2215.94,968.71 v1(2216.28,968.36) ; v1(2682.6,989.84) 2767.56,1074.8 2920.95,1074.8 2976.06,1019.69 2976.06,926.1 3071.99,830.16 IC3.1
  Bottom Layer w9.45: v1(2216.28,968.36) 2216.28,937.13 2228.57,924.84 2617.6,924.84 v1(2682.6,989.84)
NetIC3_3: IC3.3 U3.11 | length 2114.1
  Top Layer w9.45: v1@1943.67,817.88 1943.67,979.1 1994.8,1030.24 1994.8,1089.84 2016.22,1111.26 U3.11 ; v1(2888.33,745.73) 2888.33,797.77 2933.07,842.52 3004.62,842.52 3068.16,778.98 IC3.3
  Bottom Layer w9.45: v1(1944.11,817.45) 1944.11,757.94 2272.76,429.29 2824.25,429.29 2874.25,479.29 2874.25,728.28 2888.33,742.36 v1(2888.33,745.73)
NetIC3_4: IC3.4 U3.14 | length 2089.5
  Top Layer w9.45: v1(2013.04,933.26) 2071.05,933.26 2136.5,998.7 2136.5,1013.62 2136.85,1013.98 U3.14 ; v1(3047.24,755.91) 3049.31,753.84 3117.07,753.84 IC3.4
  Bottom Layer w9.45: v1(2013.04,933.26) 2012.85,933.07 1944.88,933.07 1882.84,871.03 1882.84,764.2 2257.2,389.84 2844.8,389.84 3047.24,592.28 v1(3047.24,755.91)
NetIC3_5: IC3.5 U3.45 | length 2895.4
  Top Layer w9.45: v1(2108.91,1565.74) 2108.91,1523.65 2124.11,1508.45 2145.46,1508.45 2159.69,1494.23 2159.69,1440.8 2176.22,1424.26 U3.45 ; v1(2721.5,652.52) 2869.06,652.52 2941.97,725.43 3059.87,725.43 3062.23,727.8 IC3.5
  Bottom Layer w9.45: v1(2108.91,1565.74) 2108.91,1568.36 2482.05,1941.5 2693.15,1941.5 2836.01,1798.64 2836.01,1734.7 2805.73,1704.42 2805.73,1561.45 2749.8,1505.52 2749.8,1356.01 2625.98,1232.2 2625.98,1141.73 2732.52,1035.2 2732.52,691.41 2721.5,680.38 v1(2721.5,652.52)
NetIC3_6: IC3.6 U3.41 | length 2926.7
  Top Layer w9.45: v1(2254.8,1474.84) 2254.88,1474.76 2254.88,1363.31 U3.41 ; v1(2960.63,657.48) 3005.35,702.2 IC3.6
  Bottom Layer w9.45: v1(2254.8,1474.84) 2252.65,1474.84 2212.36,1515.13 2079.52,1515.13 2055.35,1539.29 2055.35,1594.54 2076.47,1615.66 2099.84,1615.66 2464.58,1980.39 2709.26,1980.39 3102.36,1587.29 3102.36,1059.06 3062.99,1019.69 3062.99,863.93 2981.12,782.05 2981.12,677.97 v1(2960.63,657.48)
NetIC3_7: IC3.7 U3.39 | length 2497.8
  Top Layer w9.45: U3.39 2294.33,1443.77 2304.72,1454.16 2304.72,1509.75 2442.58,1647.61 2442.58,1773.27 v1(2521.66,1852.36) ; v1(2682.6,712.08) 2682.6,648.32 2708.87,622.05 2994.5,622.05 3049.07,676.61 IC3.7 ; v1(2682.6,914.84) 2682.6,939.45 2652.13,969.92 2652.13,1134.66 2658.5,1141.04 2658.5,1398.66 2673.23,1413.39 2693.35,1413.39 2734.33,1454.37 2734.33,1719.9 v1(2735.28,1720.85)
  Bottom Layer w9.45: v1(2521.66,1852.36) 2526.87,1852.36 2538.22,1863.7 2655.94,1863.7 2735.28,1784.37 v1(2735.28,1720.85) ; v1(2682.6,712.08) v1(2682.6,914.84)
NetIC3_8: IC3.8 U3.43 | length 2905.8
  Top Layer w9.45: U3.43 2215.59,1443.46 2204.88,1454.16 2204.88,1504.92 2330.71,1630.75 v1(2330.71,1704.72) ; v1(2700.79,592.67) 2700.79,590.55 2766.5,524.84 2924.8,524.84 3050.98,651.02 IC3.8
  Bottom Layer w9.45: v1(2330.71,1704.72) 2330.71,1710.69 2341.73,1721.71 2341.73,1771.76 2492.02,1922.05 2682.6,1922.05 2816.56,1788.09 2816.56,1745.69 2799.21,1728.35 2791.82,1728.35 2786.28,1722.81 2786.28,1569.51 2742.75,1525.97 2730.35,1513.58 2730.35,1364.07 2606.3,1240.02 2606.3,1133.86 2713.07,1027.09 2713.07,699.46 2689.75,676.14 2689.75,641.17 2700.79,630.13 v1(2700.79,592.67)
NetIC3_10: IC3.10 R16.1 | length 213.8
  Top Layer w9.45: R16.1@3006.54,484.84 3004.8,486.57 3004.8,574.84 3029.8,599.84 IC3.10
NetIC3_13: IC3.13 P1.14 | length 973.2
  Top Layer w11.81: IC3.13 3609.09,651.02 3700.27,559.84 4051.97,559.84 4096.57,604.45 4096.57,702.64 4079.21,720 P1.14
NetIC3_14: IC3.14 P1.12 | length 1200.2
  Top Layer w11.81: IC3.14 3642.27,676.61 v1(3680.06,638.83) ; P1.12 4081.57,820 4118.39,783.19 4118.39,550.69 v1(4065.04,497.34)
  Bottom Layer w11.81: v1(3680.06,638.83) 3714.32,638.83 3856.93,496.22 4063.92,496.22 v1(4065.04,497.34)
NetIC3_15: IC3.15 P1.10 | length 1218.3
  Top Layer w11.81: IC3.15 3729.69,702.2 v1(3832.13,599.76)
  Bottom Layer w11.81: v1(3832.13,599.76) 3835.89,596 3835.89,578.95 3875,539.84 4031.24,539.84 4127.4,636 4127.4,824.41 P1.10
NetIC3_16: IC3.16 P1.8 | length 1383.4
  Top Layer w11.81: IC3.16 3582.76,727.8 3595.12,740.16 v1(3641.73,740.16)
  Bottom Layer w11.81: v1(3641.73,740.16) 3643.84,740.16 3865.96,518.03 4040.27,518.03 4149.29,627.05 4149.29,902.52 P1.8
NetIC3_17: IC3.17 P1.6 | length 1592.4
  Top Layer w11.81: IC3.17 3577.5,753.39 3629.92,805.81 v1(3629.92,905.51)
  Bottom Layer w11.81: v1(3629.92,905.51) 3719.82,905.51 3838.39,1024.08 3838.39,1358.8 3881.16,1401.57 4059.06,1401.57 4109.8,1350.83 4109.8,1154.84 4078.04,1123.08 4034.89,1123.08 P1.6
NetIC3_18: IC3.18 P1.2 | length 1318.5
  Top Layer w11.81: IC3.18 3558.5,778.98 3594.49,814.96 v1(3594.49,933.07) ; v1(3949.13,1433.23) 3991.97,1433.23 4031.81,1393.39 P1.2
  Bottom Layer w11.81: v1(3594.49,933.07) 3597.23,935.81 3615.45,935.81 3619.49,939.85 3645.91,939.85 3658.37,927.39 3710.85,927.39 3816.04,1032.57 3816.04,1367.3 3873.94,1425.2 3913.39,1425.2 3921.42,1433.23 v1(3949.13,1433.23)
NetIC3_20: IC3.20 P1.15 | length 752.3
  Top Layer w11.81: IC3.20 3349.8,874.84 3374.36,899.4 v1@3419.36,899.4
  Bottom Layer w11.81: v1(3419.8,899.84) 3464.8,899.84 3569.53,795.12 3756.69,795.12 P1.15
NetLED1_1: LED1.1 R1.1 | length 290.1
  Top Layer w11.81: LED1.1 1150.91,1839.8 1165.67,1854.57 1170.59,1854.57 1180.91,1864.88 R1.1
NetLED2_1: LED2.1 R2.1 | length 292.9
  Top Layer w9.45: LED2.1 854.8,2189.84 914.8,2249.84 R2.1
NetLED3_1: LED3.1 R3.1 | length 148.5
  Top Layer w9.45: LED3.1@515.2,1397.56 LED3.1 517.48,1255.71 R3.1
NetLED4_1: LED4.1 R5.2 | length 139.2
  Top Layer w9.45: R5.2 1866.93,1781.97 LED4.1
NetLED4_2: LED4.2 R4.1 | length 125.3
  Top Layer w9.45: LED4.2 2131.93,1781.97 2159.8,1809.84 R4.1
NetP0_2: P0.2 SW2.3 | length 930.7
  Top Layer w27.56: SW2.3 550.64,1724.95 494.54,1724.95 465.71,1753.78 465.71,1989.88 580.16,2104.33 P0.2
NetP3_2: P3.2 U3.34 | length 558.7
  Top Layer w9.45: U3.34 2389.41,1268.15 2419.73,1268.15 2419.97,1267.91 2420.06,1267.91 2442.54,1245.43 2473.86,1245.43 v1(2497.48,1269.06) ; v1(2559.06,1606.3) 2559.78,1605.57 2625.54,1605.57 P3.2
  Bottom Layer w9.45: v1(2497.48,1269.06) 2497.48,1544.72 v1(2559.06,1606.3)
NetP3_3: P3.3 U3.37 | length 501.8
  Top Layer w9.45: U3.37 2333.7,1428.13 2343.62,1438.05 2343.62,1488.78 2559.69,1704.84 P3.3
NetP4_2: P4.2 R17.1 R18.1 SW7.3 | length 938.9
  Top Layer w27.56: SW7.3 664.8,1006.85 664.8,1119.84 699.8,1154.84 749.53,1154.84 R17.1 R18.1 944.65,1155 974.8,1124.84 974.8,806.77 P4.2
NetR5_1: R5.1 U3.2 | length 530.9
  Top Layer w9.45: R5.1 1854.84,1671.58 1836.93,1653.66 1836.93,1478.03 1960.08,1354.88 1960.08,1327.09 1998.74,1288.43 U3.2
NetR6_1: R6.1 U3.44 | length 223.3
  Top Layer w9.45: R6.1 2179.8,1451.74 2195.91,1435.64 U3.44
NetR6_2: R6.2 SW3.2 | length 1001.5
  Top Layer w9.45: R6.2 2179.8,1719.84 2209.8,1749.84 2339.8,1749.84 2364.8,1774.84 2364.8,1989.84 2354.47,2000.17 2354.47,2071.33 v1(2350.83,2074.97) ; SW3.2 2519.47,2460.45 2519.47,2395.18 v1(2519.8,2394.84)
  Bottom Layer w9.45: v1(2350.83,2074.97) 2350.83,2134.83 2519.8,2303.81 v1(2519.8,2394.84)
NetR8_1: R8.1 SW6.2 | length 170
  Top Layer w9.45: SW6.2 2008.39,695.12 2073.98,760.71 R8.1
NetR8_2: R8.2 U3.20 | length 286.1
  Top Layer w9.45: R8.2 2167.03,868.98 2254.37,956.32 2254.37,1035.87 U3.20
NetSW5_1: SW5.1 U3.1 | length 866.5
  Top Layer w9.45: U3.1 2114.37,1308.11 2170.08,1252.4 2170.08,1190.24 2240.08,1120.24 2341,1120.24 2346.54,1114.7 2346.54,1083.76 2357.58,1072.72 2526.93,1072.72 2615.43,984.21 SW5.1
pads on no net: IC1.6 IC1.7 IC1.8 IC1.9 IC1.12 IC1.13 IC1.14 IC1.15 IC2.9 IC2.12 IC3.9 IC3.12 P2. P4. SW2.1 SW3. SW6. U1.4 U2.4 U3.16 U3.17 U3.19 U3.25 U3.26 U3.27 U3.28 U3.29 U3.32 U3.33 U3.46
copper on no net:
  other v2: 236.22,248.03 4295.28,248.03 236.22,2834.65 4295.28,2834.65

## Polygon pours and split planes (outlines as drawn)
no net on Top Layer "NONET_L01_P000" (solid, remove dead copper, pour order 0): 584.09,2706.06 446.3,2568.27
GND on Bottom Layer "GND_L02_P002" (solid, remove dead copper, pour order 2): 4225.83,855.67 4225.83,521.02 4107.72,402.91 3340,402.91 3182.52,245.43 1883.31,245.43 1745.51,383.23 1312.44,383.23 1214.02,481.65 584.09,481.65 288.82,776.93 288.82,2017.09 426.61,2154.88 426.61,2587.95 584.09,2745.43 2749.45,2745.43 3084.09,2410.79 3458.11,2410.79 3635.28,2233.62 4107.72,2233.62 4225.83,2115.51 4225.83,954.09

## Keep-outs
Keep-Out Layer:
  the board outline again, w0

## Silkscreen, mask and mechanical layers (free items; w line width, h text height)
Top Overlay:
  text "INPUT" at 604.8,2659.84 h31.5
  text "UART" at 2054.8,2624.84 h31.5
  text "1/0" at 2314.8,2614.84 h31.5
  text "BOOT2" at 2559.8,2614.84 h31.5
  text "5V" at 1464.8,2534.84 h31.5
  text "TX" at 2338.15,2426.26 h31.5
  text "3.3V" at 1374.8,2369.84 h31.5
  text "RX" at 2343.15,2346.26 h31.5
  text "12VDC" at 499.8,2339.84 h31.5
  text "MAX" at 529.8,2274.84 h31.5
  text "GND" at 1849.8,2269.84 h31.5
  text "PWR" at 844.8,2139.84 h31.5
  text "GND" at 2709.8,1804.84 h31.5
  text "5V" at 1099.8,1739.84 h39.37
  text "3V" at 3989.8,1739.84 h47.24
  text "STLINK" at 2923.07,1706.85 h31.5 r90
  text "PC13" at 1984.8,1699.84 h31.5
  text "SWCLK" at 2710.79,1647.8 h31.5
  text "CR2032" at 3804.8,1644.84 h47.24
  text "ON/OFF" at 686.85,1584.8 h31.5 r90
  text "SWIO" at 2710.79,1565.12 h31.5
  text "RESET" at 1269.8,1499.84 h31.5
  text "3.3V" at 2710.79,1486.38 h31.5
  text "3.3V" at 439.8,1459.84 h31.5
  text "3.3V" at 494.8,1124.84 h31.5
  text "SDA" at 839.8,939.84 h31.5
  text "VIN" at 994.8,939.84 h31.5 r90
  text "GND" at 1029.8,939.84 h31.5
  text "SCL" at 769.8,839.84 h31.5 r90
  text "VIN" at 2529.8,819.84 h31.5 r90
  text "I2C POWER" at 649.8,789.84 h31.5 r90
  text "5V" at 519.8,624.84 h31.5
  text "BAT" at 2529.8,619.84 h31.5 r90
  text "Dim Grey Ltd." at 1270.84,580.87 h31.5 r90
  text "I2C" at 964.8,524.84 h39.37
  text "MCU PWR" at 2509.8,489.84 h31.5
  text "HUB75" at 3549.8,444.84 h39.37
  text "BOOT1" at 1943.07,384.02 h31.5
  text "1/0" at 2124.17,384.02 h31.5
Mechanical 1:
  the board outline again, w0
BOARD_OUTLINE:
  the board outline again, w0

## Text inside footprints (layer, text, board x,y; h text height)
B1: Top Overlay "+" at 3992.72,2165.7 h118.11 r180